# Altium PCB PCBv4.PcbDoc
Units mil, origin at the board's own origin, x right, y up, seen from the top; angles counter-clockwise.
Board outline 4330.71 x 3858.27 mil, 2 copper layers (Top Layer, Bottom Layer); 74 components, 67 nets, 275 pads, 22 vias.
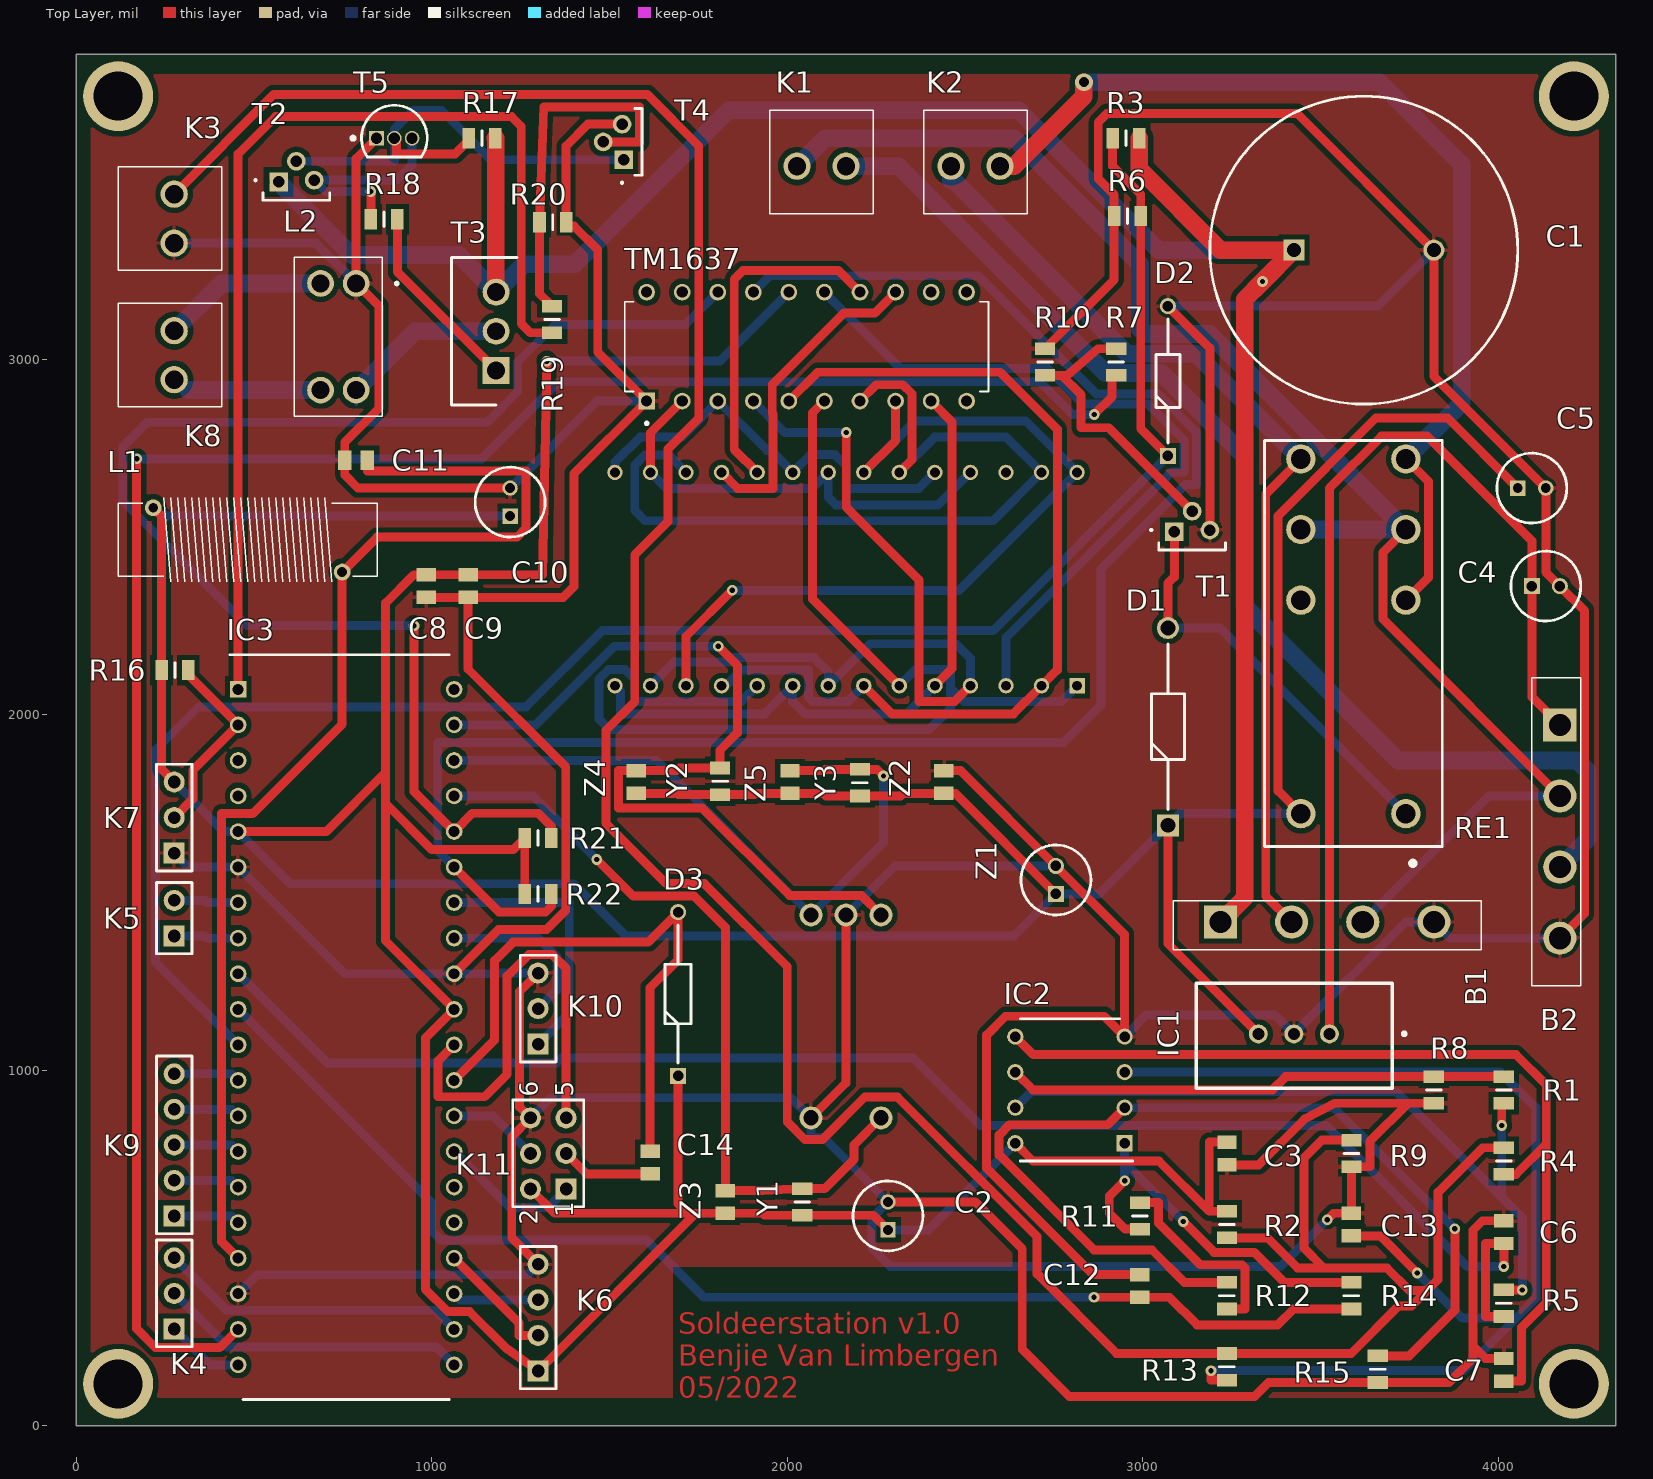
[diagram p0: Top Layer view]
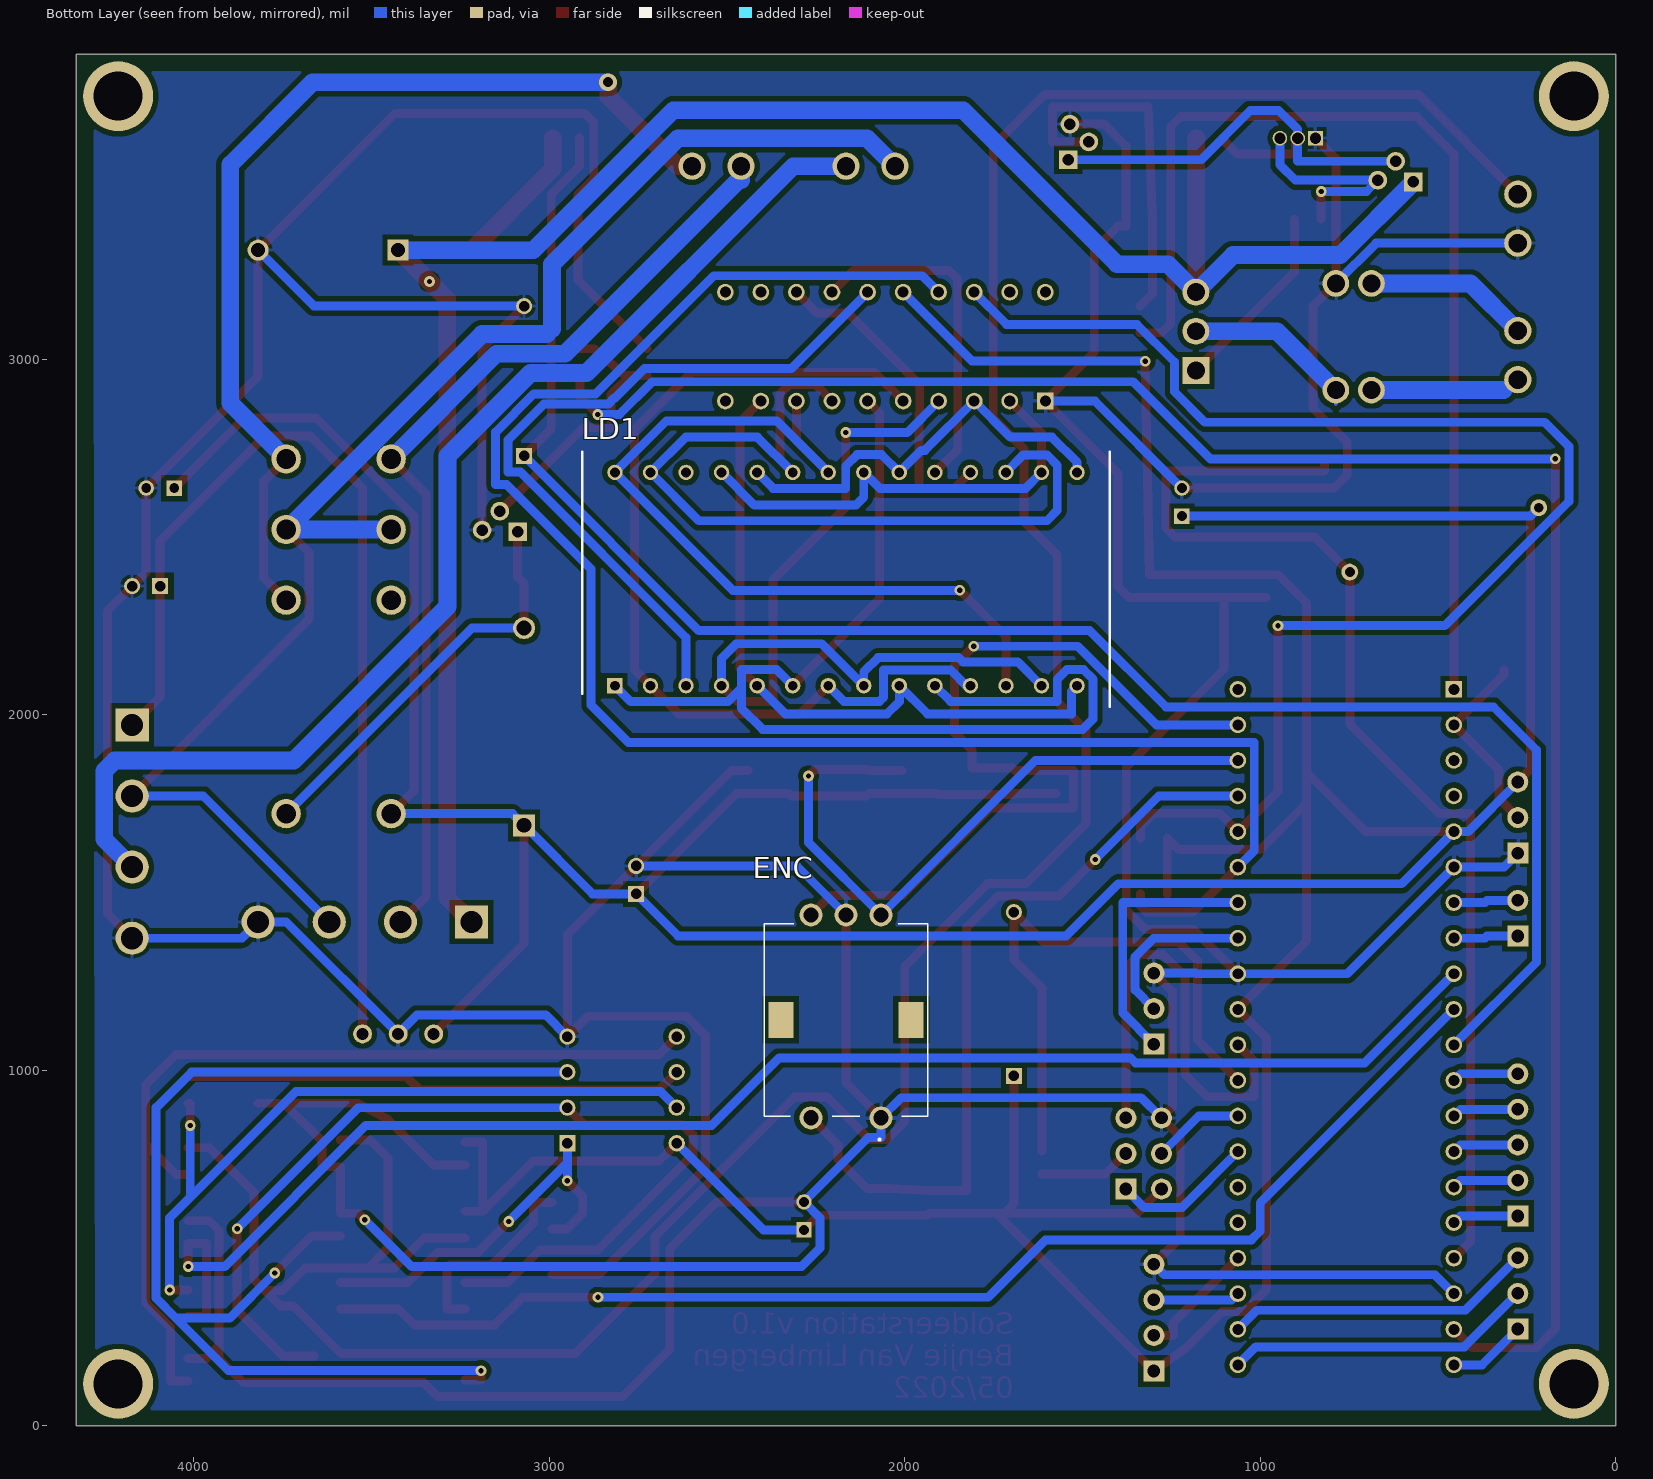
[diagram p1: Bottom Layer view, seen from below]

## Layer stack, top to bottom
Top Solder: solder mask 0.4, Solder Resist, Dk 3.5
Top Layer: signal copper 1.4
Dielectric 1: dielectric 12.6, FR-4, Dk 4.8
Bottom Layer: signal copper 1.4
Bottom Solder: solder mask 0.4, Solder Resist, Dk 3.5

## Board outline
0,0 0,3858.27 4330.71,3858.27 4330.71,0

## Design rules (kind name [scope] priority, off if disabled: settings)
Clearance Clearance_9 [InNamedPolygon('GND_L01_P004')] p1: gap=15 ignorepadtopadclearanceinfootprint=FALSE
Clearance Clearance_8 [InNamedPolygon('GND_L02_P002')] p2: gap=15 ignorepadtopadclearanceinfootprint=FALSE
Clearance Clearance_7 [InNamedPolygon('GND_L02_P002')] p3: gap=15 ignorepadtopadclearanceinfootprint=FALSE
Clearance Clearance_6 [InNamedPolygon('GND_L02_P003')] p4: gap=15 ignorepadtopadclearanceinfootprint=FALSE
Clearance Clearance_5 [InNamedPolygon('GND_L02_P003')] p5: gap=15 ignorepadtopadclearanceinfootprint=FALSE
Clearance Clearance_4 [InNamedPolygon('GND_L02_P002')] p6: gap=15 ignorepadtopadclearanceinfootprint=FALSE
Clearance Clearance_3 [InNamedPolygon('NONET_L02_P000')] p7: gap=15 ignorepadtopadclearanceinfootprint=FALSE
Clearance Clearance_2 [InNamedPolygon('NONET_L02_P000')] p8: gap=984.25 ignorepadtopadclearanceinfootprint=FALSE
Clearance Clearance_1 [InNamedPolygon('NONET_L02_P000')] p9: gap=984.25 ignorepadtopadclearanceinfootprint=FALSE
Clearance [All] p10: gap=0 ignorepadtopadclearanceinfootprint=FALSE
Height [All] p1: minheight=0 maxheight=2000 prefheight=500
PolygonConnect [All] p1: connectstyle=Relief reliefconductorwidth=10 reliefentries=4 polygonreliefangle="90 Angle" airgapwidth=10
RoutingVias [All] p1: holewidth=15 width=30 viastyle="Through Hole" minholewidth=15 minwidth=30 maxholewidth=15 maxwidth=30
SilkToSilkClearance [All] p1: silktosilkclearance=5
SilkToSolderMaskClearance [IsPad] p1: minsilkscreentomaskgap=5 clearancetoexposedcopper=TRUE
SolderMaskExpansion [All] p1: expansion=4 istentingtop=FALSE
Width [InNet('VIN')] p1: maxlimit=50 minlimit=50 preferedwidth=50 minimp=50.000000 maximp=50.000000 favimp=50.000000
27 further rules are at their usual default settings.

## Classes and differential pairs
component class voeding: B1 B2 C1 C4 C5 D1 D2 IC1 K1 K2 R3 R6 R7 R10 RE1 T1
component class opamps: C2 C3 C6 C7 C12 C13 IC2 K3 R1 R2 R4 R5 R8 R9 R11 R12 R13 R14 R15
component class main: C8 C9 C10 C11 C14 D3 IC3 K4 K5 K6 K7 K8 K9 K10 K11 L1 L2 R16 R17 R18 R19 R20 R21 R22 T2 T3 T4 T5
component class display: ENC LD1 TM1637 Y1 Y2 Y3 Z1 Z2 Z3 Z4 Z5

## Components (designator, comment, footprint, x,y, rotation, side; value= is the part's Value field where it differs from the comment)
B1 "GBU6J" GBU6J 3218.9,1417.32 r180 top
B2 "GBU6J" GBU6J 4173.23,1971.65 r90 top
C1 "860010683032" CAPPRD1000W80D2200H4100 3425.2,3307.09 r0 top
C2 "860240672002" CAPPRD200W52D500H1250 2283.46,551.18 r90 top
C3 "885012207098" CAPC2012X90N 3237.01,766.14 r90 top
C4 "100uF" CAPPRD200W55D500H1200 4094.49,2362.2 r0 top
C5 "860010683032" CAPPRD200W52D500H1250 4055.12,2637.79 r0 top
C6 "885012205067" CAPC2012X90N 4015.75,544.88 r90 top
C7 "885012205067" CAPC2012X90N 4015.75,157.48 r90 top
C8 "885012207098" CAPC2012X90N 984.25,2362.2 r90 top
C9 "885012207098" CAPC2012X90N 1102.36,2362.2 r90 top
C10 "860240672002" CAPPRD200W52D500H1250 1220.47,2559.06 r90 top
C11 "885012207098" CAPC2012X90N 787.4,2716.54 r0 top
C12 "885012205067" CAPC2012X90N 2992.13,393.7 r90 top
C13 "885012205067" CAPC2012X90N 3587.01,566.14 r90 top
C14 "885012207092" CAPC2012X90N 1614.17,740.55 r90 top
D1 "1N4007" DIOAD1410W86L470D235 3070.87,1688.98 r90 top
D2 "1N5231BTR" DIOAD1068W53L380D172 3070.87,2728.35 r90 top
D3 "1N4148" DIOAD1165W56L425D185 1692.91,984.25 r90 top
ENC "482016514001" 482016514001 2165.35,1141.73 r90 bottom locked
IC1 "TSR_2-2450" TSR-2 3702.36,949.21 r180 top
IC2 "MCP6002-E_P" DIP781W56P254L950H533Q8N 2795.28,944.88 r180 top
IC3 "ATMEGA4809-PF" DIP1543W58P254L5175H635Q40N 759.25,1121.65 r0 top
K1 "691214110002" 691214110002 2027.56,3543.31 r0 top
K2 "691214110002" 691214110002 2460.63,3543.31 r0 top
K3 "691214110002" 691214110002 275.59,3326.77 r90 top
K4 "61300311121" HDR1X3 275.59,272.44 r90 top
K5 "61300211121" HDR1X2 275.59,1377.95 r90 top
K6 "61000418221" HDR1X4 1299.21,154.33 r90 top
K7 "61300311121" HDR1X3 275.59,1611.02 r90 top
K8 "691214110002" 691214110002 275.59,2942.74 r90 top
K9 "61300511121" HDR1X5 275.59,590.32 r90 top
K10 "61300311121" HDR1X3 1299.21,1073.65 r90 top
K11 "61000621121" HDR2X3 1377.95,666.14 r90 top
L1 "744711003" 744711003 748.03,2401.57 r180 top
L2 "CM2545X171B-10" CM2545X171B10 787.4,3213.39 r180 top
LD1 "LB-603MF" DIP1524W50P254L3750H820Q28N 2165.35,2381.89 r90 bottom locked
R1 "smd" RESC2012X60N 4015.75,944.88 r90 top
R2 "smd" RESC2012X60N 3237.01,566.14 r90 top
R3 "CRCW08051M00JNEAC" RESC2012X60N 2952.76,3622.05 r0 top
R4 "smd" RESC2012X60N 4015.75,744.88 r90 top
R5 "smd" RESC2012X60N 4015.75,344.88 r90 top
R6 "CRCW08051M00JNEAC" RESC2012X60N 2957.09,3402.91 r0 top
R7 "CRCW08051M00JNEAC" RESC2012X60N 2925.2,2992.28 r90 top
R8 "smd" RESC2012X60N 3818.9,944.88 r90 top
R9 "smd" RESC2012X60N 3587.01,766.14 r90 top
R10 "CRCW08051M00JNEAC" RESC2012X60N 2725.2,2992.28 r90 top
R11 "smd" RESC2012X60N 2992.13,590.55 r90 top
R12 "smd" RESC2012X60N 3237.01,366.14 r90 top
R13 "smd" RESC2012X60N 3237.01,166.14 r90 top
R14 "smd" RESC2012X60N 3587.01,366.14 r90 top
R15 "smd" RESC2012X60N 3661.42,159.45 r90 top
R16 "C" RESC2012X60N 277.56,2125.98 r0 top
R17 "smd" RESC2012X60N 1141.73,3622.05 r0 top
R18 "smd" RESC2012X60N 866.14,3394.07 r0 top
R19 "smd" RESC2012X60N 1338.58,3112.2 r90 top
R20 "smd" RESC2012X60N 1340.55,3385.83 r0 top
R21 "CRCW08051M00JNEAC" RESC2012X60N 1299.21,1653.54 r0 top
R22 "CRCW08051M00JNEAC" RESC2012X60N 1299.21,1496.06 r0 top
RE1 "RT424005" RT42 3592.52,1722.04 r90 top (schematic designator X1)
T1 "BC547CBU" BC547CBU 3088.98,2519.68 r0 top
T2 "BC547CBU" BC547CBU 569.29,3503.94 r0 top
T3 "IRF9Z34NPBF" TO254P469X1042X1967-3P 1181.1,2978.98 r90 top
T4 "BC547CBU" BC547CBU 1535.43,3561.42 r90 top
T5 "BC557CG" ONSC-TO-92-3-29-11 894.88,3622.05 r0 top
TM1637 "*" DIP778W43P254L2612H431Q20N 2054.72,3035.83 r90 top
Y1 "ESR10EZPJ183" RESC2012X60N 2042.32,629.92 r90 top
Y2 "ESR10EZPJ183" RESC2012X60N 1811.02,1812.99 r90 top
Y3 "ESR10EZPJ183" RESC2012X60N 2204.72,1809.06 r90 top
Z1 "860010683032" CAPPRD200W55D500H1200 2755.91,1496.06 r90 top
Z2 "860240672002" CAPC2012X90N 2440.94,1811.02 r90 top
Z3 "100uF" CAPC2012X90N 1825.79,629.92 r90 top
Z4 "100uF" CAPC2012X90N 1574.8,1811.02 r90 top
Z5 "100uF" CAPC2012X90N 2007.87,1811.02 r90 top

## Footprints (in the part's own frame and the unit in brackets; to place one, negate y for a bottom-side part, rotate by r counter-clockwise, add the part's x,y. Pads: shape width x height; smd on the part's side, far side on the other; paste and mask are expansions set on the pad)
744711003 [mm]
  round 1.2 hole 0.7: 1(0,0) 2(13.5,-4.6)
  silkscreen extent -2.5,-5.3 16,0.7, body extent -2.5,-4.9 16,0.3, height 6.3
482016514001 [mm]
  round 1.65 hole 1.1: 1(-7,-2.5) 2(-7,2.5) 3(7.5,-2.5) 4(7.5,0) 5(7.5,2.5)
  rect 2.6x1.8 smd: MP1(0,-4.65) MP2(0,4.65)
  silkscreen extent -8.6,-5.85 6.88,5.85, body extent -7.45,-5.85 7.95,5.85, height 27
691214110002 [mm]
  round 1.95 hole 1.3: 1(0,0) 2(3.5,0)
  silkscreen extent -1.95,-3.4 5.45,4, body extent -1.95,-3.4 5.45,4, height 8.8
BC547CBU [mm]
  rect 1.333x1.333 hole 0.82: 1(0,-0.127)
  round 1.333 hole 0.82: 2(1.27,1.35) 3(2.54,0)
  silkscreen extent -1.7,-1.43 3.65,0.05, body extent -1.11,-1.43 3.65,2.19, height 5.43
CAPC2012X90N [mm]
  rect 0.96x1.39 smd: 1(-0.81,0) 2(0.81,0)
  body extent -1,-0.63 1,0.63, height 0.9
CAPPRD200W52D500H1250 [mm]
  rect 1.1x1.1 hole 0.7: 1(0,0)
  round 1.1 hole 0.7: 2(2,0)
  silkscreen extent -1.5,-2.5 3.5,2.5, body extent -1.75,-2.75 3.75,2.75, height 12.5
CAPPRD200W55D500H1200 [mm]
  rect 1.15x1.15 hole 0.75: 1(0,0)
  round 1.15 hole 0.75: 2(2,0)
  silkscreen extent -1.5,-2.5 3.5,2.5, body extent -1.75,-2.75 3.75,2.75, height 12
CAPPRD1000W80D2200H4100 [mm]
  rect 1.5x1.5 hole 1: 1(0,0)
  round 1.5 hole 1: 2(10,0)
  silkscreen extent -6,-11 16,11, body extent -6.25,-11.25 16.25,11.25, height 41
CM2545X171B10 [mil]
  round 75 hole 50: 1(0,0) 2(100,0) 3(100,300) 4(0,300)
  silkscreen extent -118,-74 174,374, body extent -74,-74 174,374, height 378
DIOAD1068W53L380D172 [mm]
  rect 1.15x1.15 hole 0.75: 1(0,0)
  round 1.15 hole 0.75: 2(10.7,0)
  silkscreen extent 0.93,-0.86 9.78,0.86, body extent -0.26,-0.95 10.95,0.95, height 1.9
DIOAD1165W56L425D185 [mm]
  rect 1.15x1.15 hole 0.75: 1(0,0)
  round 1.15 hole 0.75: 2(11.7,0)
  silkscreen extent 0.93,-0.93 10.78,0.92, body extent -0.28,-0.92 11.93,0.92, height 1.84
DIOAD1410W86L470D235 [mm]
  rect 1.575x1.575 hole 1.05: 1(0,0)
  round 1.575 hole 1.05: 2(14.1,0)
  silkscreen extent 1.14,-1.18 12.96,1.18, body extent -0.43,-1.35 14.53,1.35, height 2.69
DIP778W43P254L2612H431Q20N [mm] "TM1637"
  rect 1.19x1.19 hole 0.79: 1(-3.89,11.43)
  round 1.19 hole 0.79: 2(-3.89,8.89) 3(-3.89,6.35) 4(-3.89,3.81) 5(-3.89,1.27) 6(-3.89,-1.27) 7(-3.89,-3.81) 8(-3.89,-6.35) 9(-3.89,-8.89) 10(-3.89,-11.43) 11(3.89,-11.43) 12(3.89,-8.89) 13(3.89,-6.35) 14(3.89,-3.81) 15(3.89,-1.27) 16(3.89,1.27) 17(3.89,3.81) 18(3.89,6.35) 19(3.89,8.89) 20(3.89,11.43)
  silkscreen extent -5.58,-13 3.2,13, body extent -4.03,-13 4.03,13, height 4.31
DIP781W56P254L950H533Q8N [mm]
  rect 1.158x1.158 hole 0.758: 1(-3.905,3.81)
  round 1.158 hole 0.758: 2(-3.905,1.27) 3(-3.905,-1.27) 4(-3.905,-3.81) 5(3.905,-3.81) 6(3.905,-1.27) 7(3.905,1.27) 8(3.905,3.81)
  silkscreen extent -4.48,-5.08 3.56,5.08, body extent -4.04,-4.75 4.04,4.75, height 5.33
DIP1524W50P254L3750H820Q28N [mm]
  rect 1.1x1.1 hole 0.7: 1(-7.62,16.51)
  round 1.1 hole 0.7: 2(-7.62,13.97) 3(-7.62,11.43) 4(-7.62,8.89) 5(-7.62,6.35) 6(-7.62,3.81) 7(-7.62,1.27) 8(-7.62,-1.27) 9(-7.62,-3.81) 10(-7.62,-6.35) 11(-7.62,-8.89) 12(-7.62,-11.43) 13(-7.62,-13.97) 14(-7.62,-16.51) 15(7.62,-16.51) 16(7.62,-13.97) 17(7.62,-11.43) 18(7.62,-8.89) 19(7.62,-6.35) 20(7.62,-3.81) 21(7.62,-1.27) 22(7.62,1.27) 23(7.62,3.81) 24(7.62,6.35) 25(7.62,8.89) 26(7.62,11.43) 27(7.62,13.97) 28(7.62,16.51)
  silkscreen extent -9.1,-18.85 9.1,18.85, body extent -9,-18.75 9,18.75, height 8.2
DIP1543W58P254L5175H635Q40N [mil]
  rect 46.61x46.61 hole 30.87: 1(-303.74,950)
  round 46.61 hole 30.87: 2(-303.74,850) 3(-303.74,750) 4(-303.74,650) 5(-303.74,550) 6(-303.74,450) 7(-303.74,350) 8(-303.74,250) 9(-303.74,150) 10(-303.74,50) 11(-303.74,-50) 12(-303.74,-150) 13(-303.74,-250) 14(-303.74,-350) 15(-303.74,-450) 16(-303.74,-550) 17(-303.74,-650) 18(-303.74,-750) 19(-303.74,-850) 20(-303.74,-950) 21(303.74,-950) 22(303.74,-850) 23(303.74,-750) 24(303.74,-650) 25(303.74,-550) 26(303.74,-450) 27(303.74,-350) 28(303.74,-250) 29(303.74,-150) 30(303.74,-50) 31(303.74,50) 32(303.74,150) 33(303.74,250) 34(303.74,350) 35(303.74,450) 36(303.74,550) 37(303.74,650) 38(303.74,750) 39(303.74,850) 40(303.74,950)
  silkscreen extent -327,-1047 290,1047, body extent -309,-1019 309,1019, height 250
GBU6J [mm]
  rect 2.37x2.37 hole 1.58: 1(0,0)
  round 2.37 hole 1.58: 2(-5.08,0) 3(-10.16,0) 4(-15.24,0)
  silkscreen extent -18.62,-1.5 3.38,2, body extent -18.62,-1.5 3.38,2, height 18.9
HDR1X2 [mm] "Connector; Header; 2 Position"
  rect 1.5x1.5 hole 0.9: 1(0,0)
  round 1.5 hole 0.9: 2(2.54,0)
  silkscreen extent -1.27,-1.27 3.81,1.27
HDR1X3 [mm] "Connector; Header; 3 Position"
  rect 1.5x1.5 hole 0.9: 1(0,0)
  round 1.5 hole 0.9: 2(2.54,0) 3(5.08,0)
  silkscreen extent -1.27,-1.27 6.35,1.27
HDR1X4 [mm] "Connector; Header; 4 Position"
  rect 1.5x1.5 hole 0.9: 1(0,0)
  round 1.5 hole 0.9: 2(2.54,0) 3(5.08,0) 4(7.62,0)
  silkscreen extent -1.27,-1.27 8.89,1.27
HDR1X5 [mm] "Connector; Header; 5 Position"
  rect 1.5x1.5 hole 0.9: 1(0,0)
  round 1.5 hole 0.9: 2(2.54,0) 3(5.08,0) 4(7.62,0) 5(10.16,0)
  silkscreen extent -1.27,-1.27 11.43,1.27
HDR2X3 [mm] "Connector; Header; 3x2 Position"
  rect 1.5x1.5 hole 0.9: 1(0,0)
  round 1.5 hole 0.9: 2(0,2.54) 3(2.54,0) 4(2.54,2.54) 5(5.08,0) 6(5.08,2.54)
  silkscreen extent -1.27,-1.27 6.35,3.81
ONSC-TO-92-3-29-11 [mm] "TO, 3-Leads, Body Dia 4.7mm, Pitch 1.27mm"
  rect 1.05x1.05 hole 0.8: 1(-1.27,0)
  round 1.05 hole 0.8: 2(0,0) 3(1.27,0)
  silkscreen extent -3.07,-1.34 2.35,2.35, body extent -2.35,-1.33 2.36,2.36, height 7.87
RESC2012X60N [mm]
  rect 0.9x1.45 smd: 1(-0.95,0) 2(0.95,0)
  silkscreen extent 0,-0.53 0,0.53, body extent -1,-0.63 1,0.63, height 0.6
RT42 [mm]
  round 2.1 hole 1.4: 1(0,-3.75) 2(15.26,-3.75) 3(20.3,-3.75) 4(25.34,-3.75) 5(25.34,3.75) 6(20.3,3.75) 7(15.26,3.75) 8(0,3.75)
  silkscreen extent -3.67,-6.35 26.65,6.35, body extent -2.21,-6.35 26.79,6.35, height 15.86
TO254P469X1042X1967-3P [mm]
  rect 1.92x1.92 hole 1.28: 1(-0.254,0)
  round 1.92 hole 1.28: 2(2.54,0) 3(5.334,0)
  silkscreen extent -2.73,-1.49 7.81,3.2, body extent -2.67,-1.5 7.75,3.19, height 18.84
TSR-2 [mm]
  round 1.35 hole 0.85: 1(4.5,-3.89) 2(7.04,-3.89) 3(9.58,-3.89)
  silkscreen extent -0.96,-7.5 14,0, body extent 0.01,-7.5 14.01,0, height 10.33

## Part data
B1 B2: "Bridge Rectifier", Manufacturer_Name="GeneSiC Semiconductor", Datasheet Link=https://www.diodemodule.com/silicon_products/bridge_rectifiers/gbu6j.pdf, Height=18.8mm, Manufacturer_Part_Number=GBU6J
C1: "Capacitor C1 4700u 50v", Manufacturer_Name="Wurth Elektronik", Datasheet Link=https://componentsearchengine.com/Datasheets/2/860010683032.pdf, Height=41mm, Manufacturer_Part_Number=860010683032
C2: "Capacitor Polarised 10uf 50v stee 2mm 5x11mm", Manufacturer_Name="Wurth Elektronik", Datasheet Link=https://katalog.we-online.de/pbs/datasheet/860240672002.pdf, Height=12.5mm, Manufacturer_Part_Number=860240672002
C3: "Capacitor, C3,C8,C9,C11,C14 100nf", Manufacturer_Name="Wurth Elektronik", Mouser2 Part Number=710-885012207098, Datasheet Link=https://componentsearchengine.com//885012207098.pdf, Height=0.9mm, Manufacturer_Part_Number=885012207098, Mouser2 Price/Stock=https://www.mouser.com/Search/Refine.aspx?Keyword=710-885012207098
C4: library part ECA-1HHG2R2B, "Capacitor Polarised C4", Manufacturer_Name=Panasonic, Datasheet Link=http://industrial.panasonic.com/cdbs/www-data/pdf/RDF0000/ABA0000C1215.pdf, Height=12mm, Manufacturer_Part_Number=ECA-1HHG2R2B
C5: "Capacitor C5", Manufacturer_Name="Wurth Elektronik", Datasheet Link=https://componentsearchengine.com/Datasheets/2/860010683032.pdf, Height=41mm, Manufacturer_Part_Number=860010683032
C6 C7 C12 C13: "Capacitor C6, C7, C12,C13", Manufacturer_Name="Wurth Elektronik", Datasheet Link=https://katalog.we-online.com/pbs/datasheet/885012205067.pdf, Height=0.55mm, Manufacturer_Part_Number=885012205067
C8 C9 C11: "Capacitor, C3,C8,C9,C11,C14", Manufacturer_Name="Wurth Elektronik", Mouser2 Part Number=710-885012207098, Datasheet Link=https://componentsearchengine.com//885012207098.pdf, Height=0.9mm, Manufacturer_Part_Number=885012207098, Mouser2 Price/Stock=https://www.mouser.com/Search/Refine.aspx?Keyword=710-885012207098
C10: "Capacitor Polarised c10", Manufacturer_Name="Wurth Elektronik", Datasheet Link=https://katalog.we-online.de/pbs/datasheet/860240672002.pdf, Height=12.5mm, Manufacturer_Part_Number=860240672002
C14: "Capacitor c14 100n", Manufacturer_Name="Wurth Elektronik", Datasheet Link=https://katalog.we-online.com/pbs/datasheet/885012207092.pdf, Height=0.9mm, Manufacturer_Part_Number=885012207092
D1: "Diode D1", Manufacturer_Name=MULTICOMP, Datasheet Link=http://www.farnell.com/datasheets/1505911.pdf?_ga=2.248087493.396773729.1562531485-167411096.1502103357, Manufacturer_Part_Number=1N4007
D2: "Zener Diode D2", Manufacturer_Name="ON Semiconductor", Datasheet Link=https://componentsearchengine.com/Datasheets/1/1N5231BTR.pdf, Manufacturer_Part_Number=1N5231BTR
D3: "Diode D3", Manufacturer_Name=Nexperia, Datasheet Link=https://datasheet.datasheetarchive.com/originals/distributors/Datasheets-112/DSAP0040891.pdf, Manufacturer_Part_Number=1N4148
ENC: "Switch", Manufacturer_Name="Wurth Elektronik", Mouser2 Part Number=710-482016514001, Datasheet Link=https://componentsearchengine.com//482016514001.pdf, Height=26.9mm, Manufacturer_Part_Number=482016514001, Mouser2 Price/Stock=https://www.mouser.com/Search/Refine.aspx?Keyword=710-482016514001
IC1: "Power Supply IC1", Manufacturer_Name="Traco Power", Manufacturer_Part_Number="TSR 2-2450", Mouser2 Part Number=495-TSR2-2450, Datasheet Link="https://componentsearchengine.com//TSR 2-2450.pdf", Mouser2 Price/Stock=https://www.mouser.com/Search/Refine.aspx?Keyword=495-TSR2-2450
IC2: "IC Dual Opamp", Manufacturer_Name=Microchip, Manufacturer_Part_Number=MCP6002-E/P, Mouser2 Part Number=579-MCP6002-E/P, Datasheet Link=https://componentsearchengine.com//MCP6002-E_P.pdf, Height=5.334mm, Mouser2 Price/Stock=https://www.mouser.com/Search/Refine.aspx?Keyword=579-MCP6002-E%2FP
IC3: "Integrated Circuit", Manufacturer_Name=Microchip, Mouser2 Part Number=556-ATMEGA4809-PF, Datasheet Link=https://componentsearchengine.com//ATMEGA4809-PF.pdf, Height=6.35mm, Manufacturer_Part_Number=ATMEGA4809-PF, Mouser2 Price/Stock=https://www.mouser.com/Search/Refine.aspx?Keyword=556-ATMEGA4809-PF
K1 K2 K8: "Connector", Manufacturer_Name="Wurth Elektronik", Height=8.7mm, Manufacturer_Part_Number=691214110002
K3: "Connector K3", Manufacturer_Name="Wurth Elektronik", Height=8.7mm, Manufacturer_Part_Number=691214110002
K4 K7: "WR-PHD Pin Header, THT, pitch 2.54mm, Single Row, Vertical, 3p", Contact Resistance=20mOhm, Manufacturer="Wurth Elektronik", Operating Temperature="-40 to +105degC", Rated Current=3A, Withstanding Voltage=500VAC, Working Voltage=250VAC, ComponentLink1Description=Manufacturer, ComponentLink1URL=http://www.we-online.de, ComponentLink2Description=Datasheet, ComponentLink2URL=https://www.we-online.com/catalog/datasheet/61300311121.pdf, Gender="Pin Header", Manufacturer Part Number=61300311121, Mounting Technology=THT, Orientation=Vertical, Packaging=Bag, Pin Number=3, Pitch=2.54mm, Row Number=Single
K5: "WR-PHD Pin Header, THT, pitch 2.54mm, Single Row, Vertical, 2p", Contact Resistance=20mOhm, Manufacturer="Wurth Elektronik", Operating Temperature="-40 to +105degC", Rated Current=3A, Withstanding Voltage=500VAC, Working Voltage=250VAC, ComponentLink1Description=Manufacturer, ComponentLink1URL=http://www.we-online.de, ComponentLink2Description=Datasheet, ComponentLink2URL=https://www.we-online.com/catalog/datasheet/61300211121.pdf, Gender="Pin Header", Manufacturer Part Number=61300211121, Mounting Technology=THT, Orientation=Vertical, Packaging=Bag, Pin Number=2, Pitch=2.54mm, Row Number=Single
K6: "4p Header K6", Contact Resistance=20mOhm, Manufacturer="Wurth Elektronik", Operating Temperature="-40 to +125degC", Rated Current=3A, Withstanding Voltage=500VAC, Working Voltage=250VAC, ComponentLink1Description=Manufacturer, ComponentLink1URL=http://www.we-online.de, ComponentLink2Description=Datasheet, ComponentLink2URL=https://www.we-online.com/catalog/datasheet/61000418221.pdf, Gender="Pin Header", Manufacturer Part Number=61000418221, Mounting Technology=SMT, Orientation=Vertical, Packaging=Tube, Pin Number=4, Pitch=2.54mm, Row Number=Single
K9: "5P Header k9", Contact Resistance=20mOhm, Manufacturer="Wurth Elektronik", Operating Temperature="-40 to +105degC", Rated Current=3A, Withstanding Voltage=500VAC, Working Voltage=250VAC, ComponentLink1Description=Manufacturer, ComponentLink1URL=http://www.we-online.de, ComponentLink2Description=Datasheet, ComponentLink2URL=https://www.we-online.com/catalog/datasheet/61300511121.pdf, Gender="Pin Header", Manufacturer Part Number=61300511121, Mounting Technology=THT, Orientation=Vertical, Packaging=Bag, Pin Number=5, Pitch=2.54mm, Row Number=Single
K10: "3p header K10", Contact Resistance=20mOhm, Manufacturer="Wurth Elektronik", Operating Temperature="-40 to +105degC", Rated Current=3A, Withstanding Voltage=500VAC, Working Voltage=250VAC, ComponentLink1Description=Manufacturer, ComponentLink1URL=http://www.we-online.de, ComponentLink2Description=Datasheet, ComponentLink2URL=https://www.we-online.com/catalog/datasheet/61300311121.pdf, Gender="Pin Header", Manufacturer Part Number=61300311121, Mounting Technology=THT, Orientation=Vertical, Packaging=Bag, Pin Number=3, Pitch=2.54mm, Row Number=Single
K11: "WR-PHD Pin Header, SMT, pitch 2.54mm, Dual Row, Vertical, 6p", Contact Resistance=20mOhm, Manufacturer="Wurth Elektronik", Operating Temperature="-40 to +125degC", Rated Current=3A, Withstanding Voltage=500VAC, Working Voltage=250VAC, ComponentLink1Description=Manufacturer, ComponentLink1URL=http://www.we-online.de, ComponentLink2Description=Datasheet, ComponentLink2URL=https://www.we-online.com/catalog/datasheet/61000621121.pdf, Gender="Pin Header", Manufacturer Part Number=61000621121, Mounting Technology=SMT, Orientation=Vertical, Packaging=Tube, Pin Number=6, Pitch=2.54mm, Row Number=Dual
L1: "Inductor, Smoorspoel 10uH", Manufacturer_Name="Wurth Elektronik", Datasheet Link=https://www.we-online.de/katalog/datasheet/744711003.pdf, Height=6.2mm, Manufacturer_Part_Number=744711003
L2: "Transformer", Manufacturer_Name="Laird Technologies", Datasheet Link=https://datasheet.datasheetarchive.com/originals/dk/DKDS-7/122753.pdf, Height=9.5mm, Manufacturer_Part_Number=CM2545X171B-10
LD1: "Display", Manufacturer_Name="ROHM Semiconductor", Datasheet Link=https://datasheet.datasheetarchive.com/originals/distributors/Datasheets_SAMA/27b839e3b28040d1ff79b0bfb62b7eff.pdf, Height=8.2mm, Manufacturer_Part_Number=LB-603MF
R1 R4 R5 R8 R18: library part CRCW08051M00JNEAC, "100k", Manufacturer_Name=Vishay, Mouser2 Part Number=71-CRCW08051M00JNEAC, Datasheet Link=https://componentsearchengine.com//CRCW08051M00JNEAC.pdf, Height=0.6mm, Manufacturer_Part_Number=CRCW08051M00JNEAC, Mouser2 Price/Stock=https://www.mouser.com/Search/Refine.aspx?Keyword=71-CRCW08051M00JNEAC
R2: library part CRCW08051M00JNEAC, "1m", Manufacturer_Name=Vishay, Mouser2 Part Number=71-CRCW08051M00JNEAC, Datasheet Link=https://componentsearchengine.com//CRCW08051M00JNEAC.pdf, Height=0.6mm, Manufacturer_Part_Number=CRCW08051M00JNEAC, Mouser2 Price/Stock=https://www.mouser.com/Search/Refine.aspx?Keyword=71-CRCW08051M00JNEAC
R3 R6 R7 R10 R21 R22: "Resistor R1-22", Manufacturer_Name=Vishay, Mouser2 Part Number=71-CRCW08051M00JNEAC, Datasheet Link=https://componentsearchengine.com//CRCW08051M00JNEAC.pdf, Height=0.6mm, Manufacturer_Part_Number=CRCW08051M00JNEAC, Mouser2 Price/Stock=https://www.mouser.com/Search/Refine.aspx?Keyword=71-CRCW08051M00JNEAC
R9: library part CRCW08051M00JNEAC, "10m", Manufacturer_Name=Vishay, Mouser2 Part Number=71-CRCW08051M00JNEAC, Datasheet Link=https://componentsearchengine.com//CRCW08051M00JNEAC.pdf, Height=0.6mm, Manufacturer_Part_Number=CRCW08051M00JNEAC, Mouser2 Price/Stock=https://www.mouser.com/Search/Refine.aspx?Keyword=71-CRCW08051M00JNEAC
R11 R12: library part CRCW08051M00JNEAC, "18k", Manufacturer_Name=Vishay, Mouser2 Part Number=71-CRCW08051M00JNEAC, Datasheet Link=https://componentsearchengine.com//CRCW08051M00JNEAC.pdf, Height=0.6mm, Manufacturer_Part_Number=CRCW08051M00JNEAC, Mouser2 Price/Stock=https://www.mouser.com/Search/Refine.aspx?Keyword=71-CRCW08051M00JNEAC
R13 R14: library part CRCW08051M00JNEAC, "5k6", Manufacturer_Name=Vishay, Mouser2 Part Number=71-CRCW08051M00JNEAC, Datasheet Link=https://componentsearchengine.com//CRCW08051M00JNEAC.pdf, Height=0.6mm, Manufacturer_Part_Number=CRCW08051M00JNEAC, Mouser2 Price/Stock=https://www.mouser.com/Search/Refine.aspx?Keyword=71-CRCW08051M00JNEAC
R15: library part CRCW08051M00JNEAC, "100ohm", Manufacturer_Name=Vishay, Mouser2 Part Number=71-CRCW08051M00JNEAC, Datasheet Link=https://componentsearchengine.com//CRCW08051M00JNEAC.pdf, Height=0.6mm, Manufacturer_Part_Number=CRCW08051M00JNEAC, Mouser2 Price/Stock=https://www.mouser.com/Search/Refine.aspx?Keyword=71-CRCW08051M00JNEAC
R16 R20: library part CRCW08051M00JNEAC, "Resistor R1-22 / 4k7", Manufacturer_Name=Vishay, Mouser2 Part Number=71-CRCW08051M00JNEAC, Datasheet Link=https://componentsearchengine.com//CRCW08051M00JNEAC.pdf, Height=0.6mm, Manufacturer_Part_Number=CRCW08051M00JNEAC, Mouser2 Price/Stock=https://www.mouser.com/Search/Refine.aspx?Keyword=71-CRCW08051M00JNEAC
R17: library part CRCW08051M00JNEAC, "4k7", Manufacturer_Name=Vishay, Mouser2 Part Number=71-CRCW08051M00JNEAC, Datasheet Link=https://componentsearchengine.com//CRCW08051M00JNEAC.pdf, Height=0.6mm, Manufacturer_Part_Number=CRCW08051M00JNEAC, Mouser2 Price/Stock=https://www.mouser.com/Search/Refine.aspx?Keyword=71-CRCW08051M00JNEAC
R19: library part CRCW08051M00JNEAC, "10k", Manufacturer_Name=Vishay, Mouser2 Part Number=71-CRCW08051M00JNEAC, Datasheet Link=https://componentsearchengine.com//CRCW08051M00JNEAC.pdf, Height=0.6mm, Manufacturer_Part_Number=CRCW08051M00JNEAC, Mouser2 Price/Stock=https://www.mouser.com/Search/Refine.aspx?Keyword=71-CRCW08051M00JNEAC
RE1: "Relay or Contactor", Manufacturer_Name="TE Connectivity", Mouser2 Part Number=655-RT424005, Datasheet Link=https://componentsearchengine.com//RT424005.pdf, Manufacturer_Part_Number=RT424005, Mouser2 Price/Stock=https://www.mouser.com/Search/Refine.aspx?Keyword=655-RT424005
T1 T2 T4: "Transistor BJT NPN", Manufacturer_Name="ON Semiconductor", Datasheet Link=https://www.onsemi.com/pdf/datasheet/bc550-d.pdf, Height=5.33mm, Manufacturer_Part_Number=BC547CBU
T3: "MOSFET (P-Channel)", Manufacturer_Name=Infineon, Mouser2 Part Number=942-IRF9Z34NPBF, Datasheet Link=https://componentsearchengine.com//IRF9Z34NPBF.pdf, Height=4.69mm, Manufacturer_Part_Number=IRF9Z34NPBF, Mouser2 Price/Stock=https://www.mouser.com/Search/Refine.aspx?Keyword=942-IRF9Z34NPBF
T5: library part CMP-1048-01441-1, "Amplifier Transistor, PNP Silicon, 3-Pin TO-92, Pb-Free, Bulk Box", Manufacturer="On Semiconductor", ComponentLink1Description="Manufacturer URL", ComponentLink1URL=http://www.onsemi.com/, ComponentLink2Description=Datasheet, ComponentLink2URL=http://www.onsemi.com/pub_link/Collateral/BC556B-D.PDF, ComponentLink3Description="Package Specification", ComponentLink3URL=http://www.onsemi.cn/pub_link/Collateral/2N6426-D.PDF, DatasheetVersion="Rev. 3", IC Continuous (A)=-0.1, Mounting Technology="Through Hole", PackageDescription="3-Pin Transistor Outline, Body 4.825 x 3.685 mm, Pitch 1.27 mm", PackageReference=TO-92-3-29-11_AM_SL, PackageVersion="Rev. AM", Packing="Bulk Box", PartNumber=BC557CG, Polarity=PNP, RoHS=TRUE
TM1637: library part TM1637, "LED Drive Control Special Circuit", Package=Package, Availability="Not in stock", Check_prices=https://www.snapeda.com/parts/TM1637/Titan+Micro+Electronics/view-part/?ref=eda, MF="Titan Micro Electronics", MP=TM1637, Price=None, SnapEDA_Link=https://www.snapeda.com/parts/TM1637/Titan+Micro+Electronics/view-part/?ref=snap
Y1 Y2 Y3: "Resistor SMD 0805 10k", Manufacturer_Name="ROHM Semiconductor", Datasheet Link=https://datasheet.datasheetarchive.com/originals/distributors/Datasheets_SAMA/30ccb516c688c96e56c83a00b77a93f4.pdf, Height=0.65mm, Manufacturer_Part_Number=ESR10EZPJ183
Z1: "Capacitor C1", Manufacturer_Name="Wurth Elektronik", Datasheet Link=https://componentsearchengine.com/Datasheets/2/860010683032.pdf, Height=41mm, Manufacturer_Part_Number=860010683032
Z2: "Capacitor Polarised", Manufacturer_Name="Wurth Elektronik", Datasheet Link=https://katalog.we-online.de/pbs/datasheet/860240672002.pdf, Height=12.5mm, Manufacturer_Part_Number=860240672002
Z3 Z4 Z5: library part ECA-1HHG2R2B, "Capacitor Polarised C4 3,5mm 8x11mm", Manufacturer_Name=Panasonic, Datasheet Link=http://industrial.panasonic.com/cdbs/www-data/pdf/RDF0000/ABA0000C1215.pdf, Height=12mm, Manufacturer_Part_Number=ECA-1HHG2R2B

## Free pads (board coordinates)
  round 196.85 hole 137.8: 1(118.11,118.11) 1(118.11,3740.16) 1(4212.6,118.11) 1(4212.6,3740.16)

## Via types
v1: diameter 30, hole 15, Top Layer to Bottom Layer, 21 vias
v2: diameter 50, hole 28, Top Layer to Bottom Layer, 1 vias

## Nets (pads, with @x,y where several pads share a name; then routed paths per layer and width w, separated by ;. In a path a pad name is that pad's centre, name@x,y a point inside that pad or via, vN(x,y) a via of type N, cw(c..) or ccw(c..) an arc to the next point about the centre after c; other vN are vias at no path point)
+5: C2.1 C3.2 C5.1 C8.2 C9.2 C10.1 D1.1 D3.1 IC1.3 IC2.8 IC3.5 IC3.31 K6.1 K7.3 K11.2 L1.2 R2.2 R16.1 R21.1 R22.1 RE1.8 TM1637.16 Y1.1 Y2.1 Y3.1 Z1.1 Z2.1 Z3.1 Z4.1 Z5.1 | length 17877.6
  Top Layer w25: L1.2 240.16,2559.06 R16.1 240.16,1846.46 K7.3 ; IC3.5 703,1671.65 870,1838.65 ; R22.1 R21.1 1229.27,1621 1000,1621 870,1751 ; K11.2 1346.06,598.03 1720,598.03 ; v1(1324,2995) 1312.1,2394.1 C9.2 C8.2 950,2394.1 870,2314.1 870,1838.65 ; Z4.1 1691,1779.13 1694.54,1775.59 Y2.1 1907,1775.59 1910.54,1779.13 Z5.1 2102,1779.13 2109.48,1771.65 Y3.1 2319,1771.65 2326.48,1779.13 Z2.1 2472.84,1779.13 Z1.1 ; D3.1 1692.91,625.12 1720,598.03 ; C2.1 2242.13,592.52 Y1.1 1936.51,592.52 1931,598.03 Z3.1 1742.91,598.03 ; IC2.8 2691.42,745 3045.54,745 3187,603.54 ; D1.1 3070.87,1356.69 IC1.3 ; R2.2 3187,603.54 ; C3.2 3187,798.03 3187,603.54 ; RE1.8 3381.04,1785.89 3381.04,2560.04 3656,2835 3857.91,2835 C5.1 ; 870,1751 870,1838.65 ; 870,1751 870,1364.65 IC3.31 982.18,1090.85 982.18,384.82 1045.46,321.54 1105.99,321.54 1209.18,218.35 K6.1 1742.91,598.03 ; 1720,598.03 1742.91,598.03
  Bottom Layer w25: L1.2 240.16,2559.06 C10.1 ; K7.3 414.96,1671.65 IC3.5 602.17,1525 1399,1525 1546,1378 2637.84,1378 Z1.1 2877.95,1496.06 D1.1 3103.93,1722.05 RE1.8 ; v1(1324,2995) 1810.75,2995 TM1637.16 ; C2.1 2397.83,551.18 IC2.8
GND: B1.4 B2.4 C1.2 C2.2 C3.1 C4.2 C5.2 C6.2 C7.2 C8.1 C9.1 C10.2 C11.1 C12.2 C13.2 D2.2 ENC.1 ENC.4 IC1.2 IC2.4 IC3.6 IC3.18 IC3.32 K3.1 K6.4 K7.1 K10.3 K11.6 L2.1 R6.1 R8.1 R9.1 R10.2 R15.1 R20.2 T1.3 T4.3 T5.1 TM1637.1 Z1.2 Z2.2 | length 25905.1
  Top Layer w25: T5.1 787.4,3564.57 L2.1 852,3148.79 852,2863 755.51,2766.51 C11.1 755.51,2675 792.72,2637.8 C10.2 ; C8.1 C9.1@1102,2330.32 ; IC3.32 1187.02,1395.68 1322.68,1395.68 1377,1450 1377,1854 1102,2129 C9.1@1102,2330.32 ; K6.4 1225,528.54 1225,813.19 K11.6 1247,897.09 1247,1221.44 K10.3 ; T4.3 1439.37,3661.42 1377.95,3600 R20.2 1377.95,3375 1400,3375 1467,3308 1467,3020.4 TM1637.1 1400,2677.95 1400,2360.32 1370,2330.32 C9.1 C9.1@1102,2330.32 ; ENC.1 2165.35,964.57 ENC.4 ; C2.2 2529.08,629.92 2661,498 2661,215 2794,82 3314,82 3354.05,122.05 R15.1 3861.68,122.05 3929,189.37 3929,225 ; Z2.2 2487.8,1842.91 Z1.2 2949.02,1381.69 IC2.4 2891.9,1152 2614,1152 2561,1099 2561,725 2860.41,425.59 C12.2 ; R10.2 2919.69,3224.17 R6.1 2919.69,3463 2875,3507.69 2875,3667 2900,3692 3433.99,3692 C1.2 3818.9,2952.76 C5.2 4133.86,2401.58 C4.2 4243,2292.43 4243,1441.43 B2.4 ; D2.2 3188.98,3031.5 T1.3 ; C3.1 3326.25,734.25 3455,863 3541.23,907.48 3746.48,907.48 ; v1(3519,580.03) 3537,598.03 C13.2 R9.1 3639,728.74 3639,800 3746.48,907.48 ; R8.1 3746.48,907.48 ; C7.2 3964.63,189.37 3929,225 ; C6.2 3955.77,576.77 3929,550 3929,225
  Bottom Layer w25: K7.1 314.96,1571.65 IC3.6 755.51,1271.65 IC3.32 1180,1271.65 1182,1273.65 K10.3 ; K3.1 674.02,3326.77 L2.1 ; IC3.18 508.86,425 1269.88,425 K6.4 ; C10.2 1465.35,2882.68 TM1637.1 ; K11.6 1334.81,923 2010.07,923 ENC.1 2066.93,811 2102.39,811 C2.2 2239,585.46 2239,500 2291,448 3386.97,448 v1(3519,580.03) ; ENC.4 2303.15,1574.8 Z1.2 ; IC2.4 3010.13,1156 3371.56,1156 IC1.2 3740.16,1417.32 B1.4 3864.57,1371.65 B2.4 ; D2.2 3661.42,3149.61 C1.2
NetB1_2: B1.2 K2.1 RE1.5 | length 2722
  Top Layer w25: B1.2 3346.04,1490.18 3346.04,2620.84 RE1.5
  Bottom Layer w50: K2.1 2460.63,3503.94 2467.75,3503.94 2956.03,3015.65 3148.91,3015.65 RE1.5
NetB1_3: B1.3 B2.2 K1.1 RE1.3 RE1.6 | length 4284.8
  Top Layer w25: RE1.3 3676,2457.1 3676,2268.88 B2.2
  Bottom Layer w25: 2992.13,3085.51 3006.77,3070.87 ; B1.3 3973.23,1771.65 B2.2 ; RE1.3@3738.58,2521.26 RE1.3
  Bottom Layer w50: K1.1 2106.3,3622.05 2637.8,3622.05 2992.13,3267.72 2992.13,3085.51 ; 3006.77,3070.87 3188.98,3070.87 3738.58,2521.26 RE1.6
NetB2_1: B2.1 C4.1 IC1.1 | length 2837.4
  Top Layer w25: IC1.1 3525.2,2637.2 3672,2784 3800,2784 4094.49,2489.51 C4.1 4094.49,2050.39 B2.1
NetB2_3: B2.3 K1.2 | length 3342.5
  Bottom Layer w50: K1.2 2313.7,3543.31 2895.5,2961.5 3052.52,2961.5 3286,2728.02 3286,2304.55 3719.06,1871.49 4222.68,1871.49 4251.97,1842.2 4251.97,1650.39 B2.3
NetC6_1: C6.1 IC3.9 R5.1 | length 4287
  Top Layer w25: R5.1 3964,307.48 3964,512.99 C6.1 v1(4015.75,448)
  Bottom Layer w25: IC3.9 706.17,1021 1351,1021 1365,1035 2353,1035 2543,845 3516,845 3913,448 v1(4015.75,448)
NetC7_1: C7.1 IC2.5 R4.1 | length 2616.5
  Top Layer w25: IC2.5 2692.42,1044 4050,1044 4135,959 4135,792.48 ; C7.1 4066,125.59 4066,277 4135,346 4135,792.48 ; R4.1 4050,707.48 4135,792.48
NetC11_2: C11.2 IC3.17 L1.1 | length 3345.9
  Top Layer w25: IC3.17 409,518.17 409,1722 496,1722 748.03,1974.03 L1.1 846.46,2500 1240,2500 1265,2525 1265,2686 819.29,2686 C11.2
NetC12_1: C12.1 IC3.10 R14.1 | length 3564.1
  Top Layer w25: v1(2863,361.81) C12.1 3075.19,361.81 3153,284 3379.75,284 3424.49,328.74 R14.1
  Bottom Layer w25: IC3.10 1000,627.17 1000,548 1025,523 1604,523 1765.19,361.81 v1(2863,361.81)
NetC13_1: C13.1 IC2.3 R13.1 | length 3363.1
  Top Layer w25: v1(3192,155.37) 3192,128.74 R13.1 ; C13.1 3667.75,534.25 v1(3772,430)
  Bottom Layer w25: IC2.3 4006.12,994.88 4106,895 4106,359 4050,303 ; v1(3192,155.37) 3902.37,155.37 4050,303 ; v1(3772,430) 3899,303 4050,303
NetC14_1: C14.1 K11.3 | length 260
  Top Layer w25: K11.3 1435.43,708.66 C14.1
NetC14_2: C14.2 D3.2 IC3.29 | length 1661.8
  Top Layer w25: IC3.29 1177,1085.66 1177,1308.56 1229.12,1360.68 1608.71,1360.68 D3.2 1692.91,1310.91 1614,1232 1614,772.44 C14.2
NetD1_2: D1.2 RE1.1 T1.1 | length 1163.6
  Top Layer w25: D1.2 3070.87,2370 3088.98,2388.11 T1.1
  Bottom Layer w25: D1.2 3218.11,2244.1 RE1.1
NetD2_1: D2.1 IC3.11 R3.1 R6.2 | length 5074.3
  Top Layer w25: R3.1 2915.35,3543.13 2994.49,3464 R6.2 2994.49,2804.73 D2.1
  Bottom Layer w25: IC3.11 223,1304.17 223,1901 344,2022 1265,2022 1480,2237 2579.52,2237 D2.1
NetENC_2: ENC.2 IC3.37 Y1.2 Z3.2 | length 2200.5
  Top Layer w25: v1(1464,1593) 1566.98,1490.02 1738,1490.02 1826,1402.02 Z3.2@1826,661.81 ; Z3.2 Z3.2@1826,661.81 ; ENC.2 2188,790.36 2188,750 2105.32,667.32 Y1.2 1931,661.81 Z3.2@1826,661.81
  Bottom Layer w25: IC3.37 1285.35,1771.65 v1(1464,1593)
NetENC_3: ENC.3 IC3.38 Y3.2 Z5.2 | length 1931.7
  Top Layer w25: Z5.2 2104,1842.91 2107.54,1846.46 Y3.2 2252.54,1846.46 v1(2271,1828)
  Bottom Layer w25: IC3.38 1632.28,1871.65 ENC.3 2271,1641.08 v1(2271,1828)
NetENC_5: ENC.5 IC3.39 Y2.2 Z4.2 | length 2477.7
  Top Layer w25: v1(1806,2193) 1860,2139 1860,1949 1811.02,1900.02 Y2.2 1696.48,1850.39 1689,1842.91 Z4.2 1524.94,1842.91 1524.94,1737.73 1761,1737.73 2006.73,1492 2208.79,1492 ENC.5
  Bottom Layer w25: IC3.39 1292.36,1971.65 1513.7,2193 v1(1806,2193)
NetIC2_1: IC2.1 R11.1 R14.2 | length 1096.7
  Top Layer w25: v1(2949.02,689) 2906,645.98 2906,598.15 2951,553.15 R11.1 ; v1(3114,575) 3201,488 3313.81,488 3398.27,403.54 R14.2
  Bottom Layer w25: v1(2949.02,689) 2949.02,739.98 ; IC2.1 2949.02,739.98 ; v1(3114,575) 2949.02,739.98
NetIC2_2: IC2.2 R12.2 R15.2 | length 2799.2
  Top Layer w25: IC2.2 2901.13,847 2625,847 2596,818 2596,762 2863.39,494.61 3026.18,494.61 3117.24,403.54 R12.2 ; R15.2 3749.85,196.85 3878,325 v1(3878,554)
  Bottom Layer w25: IC2.2 3537.12,894.88 v1(3878,554)
NetIC2_6: IC2.6 R1.2 R8.2 | length 1410.3
  Top Layer w25: IC2.6 2691.42,945 3364.72,945 3402,982.28 R8.2 R1.2
NetIC2_7: IC2.7 R1.1 R5.2 | length 2118.2
  Top Layer w25: v1(4010,845) 4010,907.48 R1.1 ; R5.2 v1(4068,382.28)
  Bottom Layer w25: IC2.7 2687.65,941 3712,941 4010,643 ; v1(4010,845) 4010,643 ; v1(4068,382.28) 4068,585 4010,643
NetIC3_1: IC3.1 R19.1 | length 3009.7
  Top Layer w25: IC3.1 455.51,3577.51 561,3683 1224,3683 1252,3655 1252,3100 1277.2,3074.8 R19.1
NetIC3_2: IC3.2 K7.2 R16.2 | length 547.7
  Top Layer w25: K7.2 328,1763.43 328,1844.14 IC3.2 314.96,2112.21 R16.2
NetIC3_7: IC3.7 K5.2 | length 182.5
  Bottom Layer w25: K5.2 362,1477.95 368.3,1471.65 IC3.7
NetIC3_8: IC3.8 K5.1 | length 182.5
  Bottom Layer w25: K5.1 362,1377.95 368.3,1371.65 IC3.8
NetIC3_12: IC3.12 K9.5 | length 187.7
  Bottom Layer w25: K9.5 436.84,990.32 IC3.12
NetIC3_13: IC3.13 K9.4 | length 187.7
  Bottom Layer w25: K9.4 436.84,890.32 IC3.13
NetIC3_14: IC3.14 K9.3 | length 187.7
  Bottom Layer w25: K9.3 436.84,790.32 IC3.14
NetIC3_15: IC3.15 K9.2 | length 187.7
  Bottom Layer w25: K9.2 436.84,690.32 IC3.15
NetIC3_16: IC3.16 K9.1 | length 187.7
  Bottom Layer w25: K9.1 436.84,590.32 IC3.16
NetIC3_19: IC3.19 R7.1 | length 5739.6
  Top Layer w25: v1(170,2720) 170,273 223,220 403.86,220 IC3.19 ; v1(2864,2845) 2914,2895 2914,2954.88 R7.1
  Bottom Layer w25: v1(170,2720) 1140.37,2720 1357.37,2937 2710.5,2937 2802.5,2845 v1(2864,2845)
NetIC3_20: IC3.20 K4.1 | length 221.7
  Bottom Layer w25: K4.1 376.38,171.65 IC3.20
NetIC3_21: IC3.21 K4.2 | length 870.6
  Bottom Layer w25: K4.2 426.03,222 1012.65,222 IC3.21
NetIC3_22: IC3.22 K4.3 | length 870.6
  Bottom Layer w25: K4.3 423.03,325 1009.65,325 IC3.22
NetIC3_23: IC3.23 K6.3 | length 243.4
  Bottom Layer w25: IC3.23 1080.31,354.33 K6.3
NetIC3_24: IC3.24 K6.2 | length 346.9
  Top Layer w25: IC3.24 1245,289.65 1245,254.33 K6.2
NetIC3_27: IC3.27 K11.1 | length 401.9
  Bottom Layer w25: IC3.27 1220.65,614 1325.81,614 K11.1
NetIC3_28: IC3.28 K11.4 | length 258.7
  Bottom Layer w25: IC3.28 1172.44,871.65 K11.4
NetIC3_30: IC3.30 K11.5 | length 1289.7
  Top Layer w25: IC3.30 1017.18,1025.85 1017.18,925.85 1149,925.85 1212,988.85 1212,1264.82 1272.86,1325.68 1339.32,1325.68 1377.95,1287.05 K11.5
NetIC3_33: IC3.33 K10.2 | length 478.4
  Bottom Layer w25: IC3.33 1300,1371.65 1352,1319.65 1352,1226.44 K10.2
NetIC3_34: IC3.34 K10.1 | length 758
  Bottom Layer w25: IC3.34 1386.35,1471.65 1387,1471 1387,1161.44 K10.1
NetIC3_35: IC3.35 R22.2 TM1637.17 | length 4990.3
  Top Layer w25: IC3.35 1189.65,1445 1320,1445 1336.61,1461.61 R22.2
  Bottom Layer w25: IC3.35 1017,1617.65 1017,1922 2777,1922 2883,2028 2883,2410.57 3120.64,2648.21 3151,2648.21 3151,2795.28 3043.51,2902.77 2869.41,2902.77 2537.18,3235 1950.75,3235 TM1637.17
NetIC3_36: IC3.36 R21.2 TM1637.18 | length 3988.1
  Top Layer w25: v1(950,2251) 950,1784.65 IC3.36 1114.34,1723 1300,1723 1336.61,1686.39 R21.2
  Bottom Layer w25: v1(950,2251) 481,2251 132,2600 132,2755 200,2823 1155.72,2823 1241.4,2908.68 1241.4,2992.4 1347,3098 1713.75,3098 TM1637.18
NetK2_2: K2.2 RE1.2 RE1.4 | length 2859.1
  Top Layer w10: v2@2834.02,3778.9 v2(2834.65,3779.53)
  Top Layer w25: RE1.2 3804,2386.68 3804,2655.84 RE1.4
  Top Layer w50: K2.2 2637.8,3543.31 2834.02,3739.53 v2@2834.02,3778.9
  Bottom Layer w50: v2(2834.65,3779.53) 3665.8,3779.53 3897.64,3547.69 3897.64,2877.16 RE1.4
NetK3_2: K3.2 R2.1 R4.2 R9.2 R13.2 | length 8719.7
  Top Layer w25: K3.2 556.18,3745.16 1605.84,3745.16 1751,3600 1751,2834 1665,2748 1665,2544 1571,2450 1571,2037 1489.94,1955.94 1489.94,1695.06 1659.98,1525.02 1766.98,1525.02 2000,1292 2000,855 2050,805 2098,805 2218,925 2310,925 2702.76,532.24 2702.76,427.24 2926.46,203.54 R13.2 3586.54,203.54 3720.5,337.5 3756.5,337.5 3800,381 ; R2.1 3350.94,528.74 3435.68,444 3510,444 ; R9.2 3503.54,803.54 3454,754 3454,500 3510,444 ; R4.2 3956,782.28 3831,657.28 3831,412 3800,381 ; 3510,444 3687,444 3750,381 3800,381
NetK8_1: K8.1 L2.3 | length 372.4
  Bottom Layer w50: 314.96,2913.39 L2.3
NetK8_2: K8.2 L2.2 | length 466.8
  Bottom Layer w50: K8.2 408.44,3213.39 L2.2
NetL2_4: L2.4 T3.2 | length 501.7
  Bottom Layer w10: 787.4,2874.02 L2.4
  Bottom Layer w50: L2.4 952.99,3078.98 T3.2
NetLD1_1: LD1.1 LD1.6 LD1.10 TM1637.6 | length 3263.1
  Top Layer w25: TM1637.6 2071,2848.95 2071,2326.24 LD1.6
  Bottom Layer w25: LD1.10 1871.2,2037.74 1571,2037.74 1571,2100 1544,2127 1497.2,2127 1470.2,2100 1470.2,1988.8 1500,1959 2400,1959 2459.51,2018.51 2459.51,2075 ; LD1.6 2360.46,2127 2459.51,2127 2459.51,2075 ; LD1.1 2770.46,2037 2497.51,2037 2459.51,2075
NetLD1_2: LD1.2 LD1.7 LD1.11 TM1637.5 | length 2678.5
  Top Layer w25: TM1637.5 2085.65,2963.6 2599.4,2963.6 2760,2803 2760,2126.54 LD1.2 2636.2,2002.74 2294.51,2002.74 LD1.7
  Bottom Layer w25: LD1.11 1826.85,2081.89 1871,2126.04 2059.51,2126.04 2059.51,2049.43 2071.2,2037.74 2171.2,2037.74 LD1.7
NetLD1_3: LD1.3 TM1637.15 | length 2102.7
  Bottom Layer w25: TM1637.15 2319.7,2974 2732.5,2974 2815,2891.5 2817.16,2891.5 2834.65,2874.02 3015.47,2874.02 3116,2773.49 3116,2683.21 3081.21,2683.21 2615.35,2217.35 LD1.3
NetLD1_4: LD1.4 LD1.8 LD1.13 TM1637.4 | length 2433
  Top Layer w25: v1(2166,2794) 2166,2584 2371.2,2378.8 2371.2,2037.74 2471.2,2037.74 LD1.4
  Bottom Layer w25: LD1.13 1682.46,2149 1836.2,2149 1848.24,2161.04 2075,2161.04 2115.35,2120.69 LD1.8 2233.46,2200 2474.28,2200 2515.35,2158.92 LD1.4 ; TM1637.4 1993.4,2794 v1(2166,2794)
NetLD1_5: LD1.5 LD1.9 LD1.14 TM1637.9 | length 1939.9
  Top Layer w25: TM1637.9 2464,2823.4 2464,2130.54 LD1.5
  Bottom Layer w25: LD1.14 1530.95,2066.29 1530.95,2002.74 1936.2,2002.74 LD1.9 2015.35,2037.38 2050,2002.74 2336.2,2002.74 LD1.5
NetLD1_12: LD1.12 LD1.22 LD1.28 TM1637.8 | length 2387.7
  Top Layer w25: LD1.12 1715.35,2220.35 v1(1845,2350) ; LD1.22 2304.72,2771.26 TM1637.8
  Bottom Layer w25: v1(1845,2350) 2483.46,2350 LD1.28 2670.24,2827 2360.46,2827 LD1.22
NetLD1_15: LD1.15 LD1.20 LD1.24 TM1637.3 | length 1198.5
  Bottom Layer w25: LD1.15 1515.35,2710.13 1586.22,2781 1703.05,2781 TM1637.3 1943.37,2744.04 1953.21,2744.04 LD1.20 2065.46,2732 2134,2732 2166,2700 2166,2637 2370.46,2637 LD1.24
NetLD1_16: LD1.16 LD1.21 LD1.25 TM1637.2 | length 1292
  Top Layer w25: LD1.16 1615.35,2793.31 TM1637.2
  Bottom Layer w25: LD1.16 1660.24,2637 2070.46,2637 LD1.21 2115.35,2612.11 2137.46,2590 2423.46,2590 LD1.25
NetLD1_17: LD1.17 LD1.23 LD1.27 TM1637.7 | length 2410
  Top Layer w25: TM1637.7 2250.65,2928.6 2325,2928.6 2351,2902.6 2351,2717.54 LD1.23
  Bottom Layer w25: LD1.17 1666.24,2731 1600,2731 1571,2702 1571,2575 1600,2546 2579.46,2546 LD1.27 2616.24,2781 2414.46,2781 LD1.23
NetLD1_18: LD1.18 TM1637.13 | length 910.5
  Top Layer w25: LD1.18 1860.24,2637 1960,2637 1960,2847 1958,2849 1958,2929 2159,3130 2245.75,3130 TM1637.13
NetLD1_19: LD1.19 TM1637.14 | length 959.1
  Top Layer w25: LD1.19 1851,2746.24 1851,3225 1876,3250 2143.7,3250 TM1637.14
NetR7_2: R7.2 R10.1 T1.2 | length 807.5
  Top Layer w25: R10.1 2771.62,2954.88 ; R7.2 2874,3029.68 2787,2954.88 2771.62,2954.88 ; T1.2 2904.31,2807.5 2826.5,2807.5 2826.5,2900 2771.62,2954.88
NetR11_2: R11.2 R12.1 | length 571.6
  Top Layer w25: R11.2 3044,627.95 3044,571 3162,453 3278.81,453 3288.05,443.76 3288.05,328.74 R12.1
NetR17_1: R17.1 T2.2 T4.1 T5.2 | length 1362
  Top Layer w25: T5.2 901,3615.93 901,3578 1066.33,3578 1104.33,3616 R17.1
  Bottom Layer w25: T2.2 894.88,3557.09 T5.2 894.88,3646.88 948,3700 1028,3700 1166.58,3561.42 T4.1
NetR18_1: R18.1 T2.3 T5.3 | length 618.6
  Top Layer w25: R18.1 v1(828.74,3472)
  Bottom Layer w25: v1(828.74,3472) 701.23,3472 T2.3 900.94,3503.94 944.88,3547.88 T5.3
NetR18_2: R18.2 T3.1 | length 540.1
  Top Layer w25: R18.2 903.54,3246.54 T3.1
NetR19_2: R19.2 R20.1 T4.2 | length 1046.6
  Top Layer w25: R19.2 1303.15,3185.04 R20.1 1315.31,3710.16 1585,3710.16 1585,3611.42 T4.2
VIN: B1.1 C1.1 R3.2 R17.2 T2.1 T3.3 | length 6384.5
  Top Layer w50: R17.2 1180.12,3621.06 1180.12,3189.96 T3.3 ; R3.2 2990.16,3535.84 3218.91,3307.09 C1.1 v1(3336.91,3218.8) 3287,3168.89 3287,1485.43 B1.1
  Bottom Layer w50: T2.1 775.13,3293.1 1076.98,3293.1 T3.3 1259.84,3267.72 1402.72,3267.72 1835.79,3700.79 2651.21,3700.79 3044.91,3307.09 C1.1
pads on no net: ENC.MP1 ENC.MP2 IC3.3 IC3.4 IC3.25 IC3.26 IC3.40 LD1.26 RE1.7 TM1637.10 TM1637.11 TM1637.12 TM1637.19 TM1637.20

## Polygon pours and split planes (outlines as drawn)
GND on Bottom Layer "GND_L02_P003" (solid, pour order 3): 4282.2,3809.76 4282.19,3809.75 48.51,3809.75 48.51,48.51 43.94,43.94 4277.62,43.94
GND on Top Layer "GND_L01_P004" (solid, remove dead copper, pour order 4): 4282.2,3809.76 4282.2,76.23 4279.69,78.74 39.37,78.74 41.03,80.4 41.03,3801.36 4261.94,3801.36 4276.01,3815.43

## Other copper
Top Layer:
  text "Soldeerstation v1.0 / Benjie Van Limbergen / 05/2022" at 1692.91,78.74 h60

## Text inside footprints (layer, text, board x,y; h text height)
K11: Top Overlay "1" at 1397.95,586.14 h50 r90; Top Overlay "2" at 1297.95,566.14 h50 r90; Top Overlay "5" at 1397.95,926.14 h50 r90; Top Overlay "6" at 1297.95,926.14 h50 r90